# Altium PCB RGBParkLight.PCBDOC
Units mm, origin at the board's own origin, x right, y up, seen from the top; angles counter-clockwise.
Board outline 152.4 x 101.6 mm, 2 copper layers (Top Layer, Bottom Layer); 18 components, 25 nets, 61 pads, 14 vias.
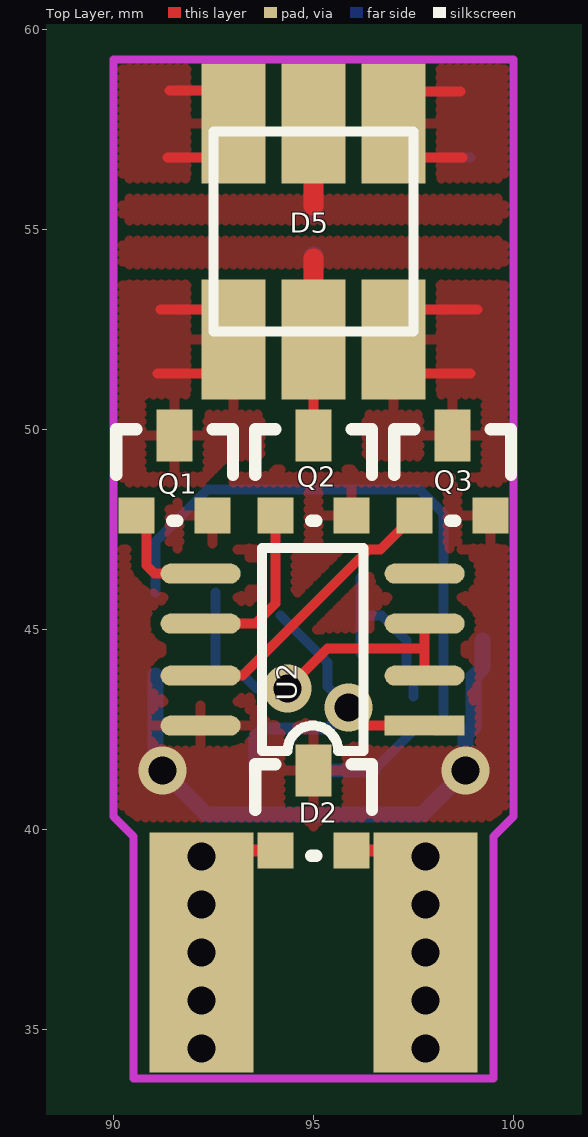
[diagram p0: Top Layer view]
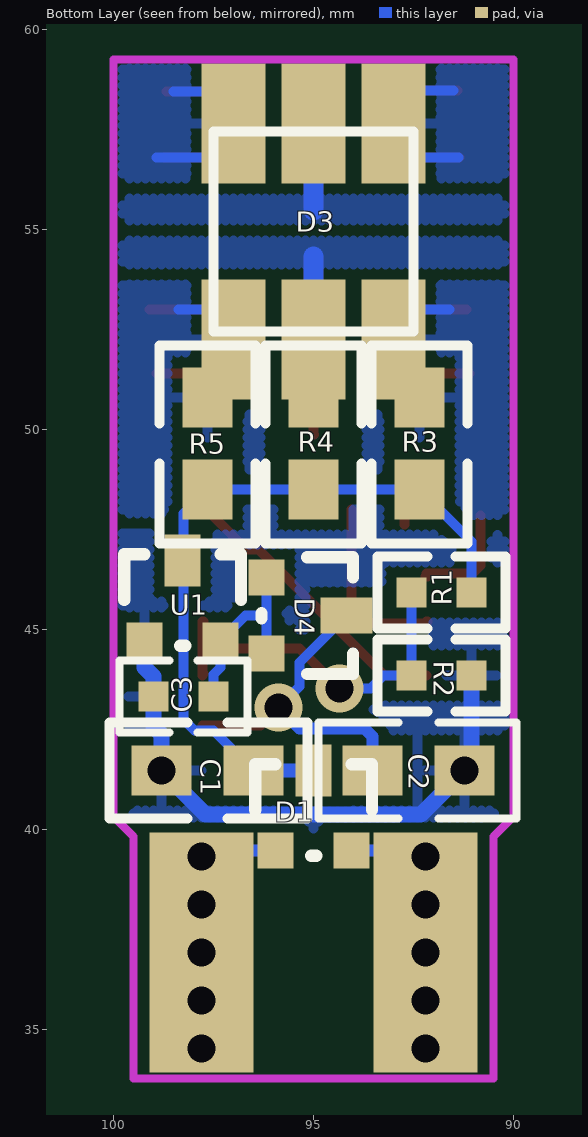
[diagram p1: Bottom Layer view, seen from below]

## Layer stack, top to bottom
Top Layer: signal copper 0.0356
Dielectric: dielectric 0.32, FR-4, Dk 4.8
Bottom Layer: signal copper 0.0356

## Board outline
25.4,25.4 177.8,25.4 177.8,127 25.4,127

## Design rules (kind name [scope] priority, off if disabled: settings)
Clearance [All] p1 off: gap=0.25
ComponentClearance [All] p1 off: gap=0 collisioncheckmode=0
PolygonConnect [All] p1: connectstyle=Relief reliefconductorwidth=0.254 reliefentries=4 polygonreliefangle="90 Angle"
RoutingLayers [All] p1: top layer=Horizontal bottom layer=Vertical
RoutingVias [All] p1: holewidth=0.711 width=1.27 viastyle="Through Hole" minholewidth=0.711 minwidth=1.27 maxholewidth=0.711 maxwidth=1.27
SolderMaskExpansion [All] p1: expansion=0.102
TestPointUsage [All] p1: valid=0 allowmultiple=FALSE
Testpoint [All] p1: side=15 testpointundercomponent=TRUE minsize=1.016 maxsize=2.54 preferedsize=1.524 minholesize=0 maxholesize=1.016 preferedholesize=0.813 testpointgrid=0.025 style=1023 order=1234567890
Width [All] p1: maxlimit=3 minlimit=0.2 preferedwidth=0.25 bottomlayer_prefwidth=0.4 minimp=50.000000 maximp=50.000000 favimp=50.000000
16 further rules are at their usual default settings.

## Components (designator, comment, footprint, x,y, rotation, side; value= is the part's Value field where it differs from the comment)
C1 "1uF/25V" 0805 96.5,41.475 r0 bottom
C2 "10uF/6.3V" 0805 93.525,41.475 r180 bottom
C3 "1uF/16V" 0603 97.5,43.325 r0 bottom
D1 "BAV70" SOT-23 95.95,39.475 r180 bottom
D2 "BAW56" SOT-23 94.05,39.475 r0 top
D3 "LED RGB" AF-5060 97,52.25 r180 bottom
D4 "BAT54C" SOT-23 96.175,46.3 r270 bottom (schematic designator D?)
D5 "LED RGB" AF-5060 97,57.65 r180 top
Q1 "DTC114YKA" SOT-23 90.575,47.85 r0 top
Q2 "DTC114YKA" SOT-23 94.05,47.85 r0 top
Q3 "DTC114YKA" SOT-23 97.525,47.85 r0 top
R1 "4k7 1%" 0603 91.05,45.925 r0 bottom
R2 "1k 1%" 0603 92.55,43.85 r180 bottom
R3 "220" 0805 92.35,48.5 r90 bottom
R4 "62" 0805 95,48.5 r90 bottom
R5 "62" 0805 97.65,48.5 r90 bottom
U1 "MCP1703" SOT-23 99.225,44.725 r180 bottom
U2 "PIC12F617" SO-8 97.775,42.6 r180 top

## Footprints (in the part's own frame and the unit in brackets; to place one, negate y for a bottom-side part, rotate by r counter-clockwise, add the part's x,y. Pads: shape width x height; smd on the part's side, far side on the other; paste and mask are expansions set on the pad)
0603 [mm]
  rect 0.75x0.75 smd: 1(0,0) 2(1.5,0)
  silkscreen extent -0.85,-0.9 2.35,0.9
0805 [mm]
  rect 1.5x1.25 smd: 1(0,0) 2(2.3,0)
  silkscreen extent -1.35,-1.2 3.6,1.2
AF-5060 [mm] "5060 SMD Package for 20 mA RGB LED with 6 pins"
  rect 1.6x3 smd: 1(0,0) 2(2,0) 3(4,0) 4(4,5.4) 5(2,5.4) 6(0,5.4)
  silkscreen extent -0.5,0.2 4.5,5.2
SO-8 [mm]
  rect 2x0.5 smd: 1(0,0)
  oval 2x0.5 smd: 2(0,-1.25) 3(0,-2.55) 4(0,-3.8) 5(5.6,-3.8) 6(5.6,-2.55) 7(5.6,-1.25) 8(5.6,0)
  silkscreen extent 1.52,-4.44 4.06,0.64
SOT-23 [mm]
  rect 0.9x0.9 smd: 1(0,0) 3(1.9,0)
  rect 0.9x1.3 smd: 2(0.95,2)
  silkscreen extent -0.51,-0.13 2.41,2.16

## Part data
C1 C2 C3: library part CAP, "Capacitor"
D1 D4: library part "DUAL DIODE BAV70"
D2: library part "DUAL DIODE BAW56"
D3 D5: library part LED
Q1 Q2 Q3: library part NPN1, "NPN Transistor"
R1 R2 R3 R4 R5: library part RES1
U1: library part VOLTREG
U2: library part PIC12F683

## Free pads (board coordinates)
  rect 2.6x6 smd: 0(92.2,36.925) 0(97.8,36.925)
  rect 2.6x6 smd far side: 0(92.2,36.925) 0(97.8,36.925)

## Via types
v1: diameter 1.2, hole 0.7, Top Layer to Bottom Layer, 14 vias

## Nets (pads, with @x,y where several pads share a name; then routed paths per layer and width w, separated by ;. In a path a pad name is that pad's centre, name@x,y a point inside that pad or via, vN(x,y) a via of type N, cw(c..) or ccw(c..) an arc to the next point about the centre after c; other vN are vias at no path point)
BLUE: Q3.1 U2.7 | length 7
  Top Layer w0.25: U2.7 93.225,43.85 96.375,47 96.675,47 Q3.1
D4AA: D3.4 | length 2.5
  Bottom Layer w0.25: 91.375,56.8 D3.4@92.75,56.8 ; 91.5,58.475 D3.4@92.625,58.475
D4AK: D5.3 | length 3
  Top Layer w0.25: 91.35,56.8 D5.3@92.875,56.8 ; 91.4,58.475 D5.3@92.825,58.475
D4BA: D3.5 | length 2.2
  Bottom Layer w0.5: 95,55.475 D3.5
D4BK: D5.2 | length 1.4
  Top Layer w0.5: 95,55.6 D5.2@95,57
D4CA: D3.6 | length 2.8
  Bottom Layer w0.25: D3.6@97.15,56.8 98.925,56.8 ; D3.6@97.425,58.45 98.5,58.45
D4CK: D5.1 | length 3.2
  Top Layer w0.25: D5.1@97.05,56.8 98.725,56.8 ; D5.1@97.175,58.45 98.675,58.45
GND: C1.2 C2.2 C3.2 D2.2 Q1.3 Q2.3 Q3.3 R2.2 U1.1 U2.8 | length 14.6
  Top Layer w0.25: Q1.3@92.725,47.625 Q1.3@92.725,47.85
  Bottom Layer w0.4: R2.2 91.05,41.65 92.325,40.375 97.7,40.375 v1(98.8,41.475) 98.8,42.375 99,42.575 99,43.825 99.225,44.05 U1.1
  other v1: 91.225,41.475
GREEN: Q2.1 U2.6 | length 4.5
  Top Layer w0.25: U2.6@92.15,45.2 U2.6@92.175,45.2 ; U2.6 93.55,45.15 94.05,45.65 Q2.1@94.05,48
IN1: D1.1 D2.3 pad.0@97.8,36.925 | length 3.8
  Top Layer w0.25: pad.0@97.65,39.475 v1(97.8,39.325)
  Top Layer w0.3: D2.3 pad.0@97.65,39.475
  Bottom Layer w0.25: pad.0@97.65,39.475 v1(97.8,39.325)
  Bottom Layer w0.3: D1.1 pad.0@97.65,39.475
  other v1: 97.8,34.525 97.8,35.725 97.8,36.925 97.8,38.125
IN2: D1.3 D2.1 pad.0@92.2,36.925 | length 3.6
  Top Layer w0.25: v1(92.2,39.325) pad.0@92.35,39.475
  Top Layer w0.3: pad.0@92.35,39.475 D2.1
  Bottom Layer w0.3: pad.0@92.35,39.475 D1.3
  other v1: 92.2,34.525 92.2,35.725 92.2,36.925 92.2,38.125
NetC3_1: C3.1 D4.1 D4.3 U1.3 | length 4.8
  Bottom Layer w0.25: D4.3 D4.1 ; 96.175,45.35 96.7,45.35 U1.3 97.325,44.05 97.5,43.875 C3.1
NetD3_1: D3.1 R5.2 | length 1
  Bottom Layer w0.25: D3.1@97.325,53 98.375,53
NetD3_2: D3.2 R4.2 | length 2.1
  Bottom Layer w0.5: D3.2 95,54.325
NetD3_3: D3.3 R3.2 | length 1.6
  Bottom Layer w0.25: 91.6,53 D3.3@93.175,53
NetD5_2: 
NetD5_4: D5.4 Q1.2 | length 4
  Top Layer w0.25: 91.1,51.4 D5.4@93.175,51.4 ; 91.175,53 D5.4@93.125,53
NetD5_5: D5.5 Q2.2 | length 3.8
  Top Layer w0.25: Q2.2@94.99,49.882 95,49.892 D5.5
  Top Layer w0.5: D5.5@95,52.875 95,54.275
NetD5_6: D5.6 Q3.2 | length 4
  Top Layer w0.25: D5.6@97,51.4 98.925,51.4 ; D5.6@97.025,53 99.1,53
NetQ2_2: 
NetR1_2: R1.2 R2.1 U2.2 U2.3 | length 9.2
  Top Layer w0.25: v1(94.35,43.525) 95.35,44.525 97.775,44.525 ; U2.2@97.75,43.9 U2.2@97.775,43.9 ; U2.3@97.75,45.2 U2.3@97.775,45.2 ; U2.2 U2.3
  Bottom Layer w0.25: R1.2 R2.1 93.25,43.85 93.575,43.525 v1(94.35,43.525)
NetU2_4: U2.4
POWER: C1.1 D1.2 R1.1 R3.1 R4.1 R5.1 U1.2 | length 18.2
  Bottom Layer w0.25: R1.1 91.05,47.2 R3.1 R5.1 98.25,47.9 98.25,46.375 98.25,42.75 97.975,42.475 97.5,42.475 C1.1
  Bottom Layer w0.35: D1.2 C1.1
RED: Q1.1 U2.5 | length 2.7
  Top Layer w0.25: Q1.1@90.825,47.85 90.825,46.6 91.025,46.4 U2.5 ; U2.5@92.15,46.325 U2.5@92.2,46.325
VCC: C2.1 D4.2 U2.1 | length 8.6
  Top Layer w0.25: v1(95.875,43.05) 96.325,42.6 U2.1
  Bottom Layer w0.25: D4.2 95.35,44.175 95.35,43.575 v1(95.875,43.05) ; 95.325,42.5 95.35,42.525
  Bottom Layer w0.3: C2.1 93.525,42.325 93.725,42.525 95.35,42.525 v1(95.875,43.05)

## Polygon pours and split planes (outlines as drawn)
GND on Top Layer (hatched 90Degree grid 0.2 track 0.25, remove dead copper): 89.775,40.075 89.775,49.85 100.25,49.85 100.25,40.075
NetD5_5 on Top Layer (hatched 90Degree grid 0.2 track 0.25, remove dead copper): 90.05,54.125 90.05,54.725 100.025,54.725 100.025,54.125
D4CK on Top Layer (hatched 90Degree grid 0.2 track 0.25, remove dead copper): 96.325,56.275 96.325,59.5 99.975,59.5 99.975,56.275
D4BK on Top Layer (hatched 90Degree grid 0.2 track 0.25, remove dead copper): 90.05,55.85 90.05,55.225 99.975,55.225 99.975,55.775 90.05,55.775
D4AK on Top Layer (hatched 90Degree grid 0.2 track 0.25, remove dead copper): 90.025,59.5 90.025,56.275 93.675,56.275 93.675,59.5
NetD5_4 on Top Layer (hatched 90Degree grid 0.2 track 0.25, remove dead copper): 93.675,48.675 93.675,53.625 90.05,53.625 90.05,48.675
NetD5_6 on Top Layer (hatched 90Degree grid 0.2 track 0.25, remove dead copper): 99.975,48.675 99.975,53.625 96.325,53.625 96.325,48.675
GND on Bottom Layer (hatched 90Degree grid 0.2 track 0.25, remove dead copper): 89.775,40.025 89.775,48.475 100.225,48.475 100.225,40.025
NetD3_1 on Bottom Layer (hatched 90Degree grid 0.2 track 0.25, remove dead copper): 96.325,47.9 96.325,53.625 100.075,53.625 100.075,47.9
NetD3_3 on Bottom Layer (hatched 90Degree grid 0.2 track 0.25, remove dead copper): 90.225,47.871 90.225,53.625 93.675,53.625 93.675,47.871
NetD3_2 on Bottom Layer (hatched 90Degree grid 0.2 track 0.25, remove dead copper): 89.875,54.125 89.875,54.725 100.025,54.725 100.025,54.125
D4AA on Bottom Layer (hatched 90Degree grid 0.2 track 0.25, remove dead copper): 93.8,56.15 89.95,56.15 89.95,59.625 93.8,59.625
D4CA on Bottom Layer (hatched 90Degree grid 0.2 track 0.25, remove dead copper): 96.275,59.55 100.075,59.55 100.075,56.275 96.332,56.275 96.332,59.55
D4BA on Bottom Layer (hatched 90Degree grid 0.2 track 0.25, remove dead copper): 90.077,55.775 100.025,55.775 100.025,55.225 90.05,55.225 90.05,55.775

## Keep-outs
Keep-Out Layer:
  lines w0.2: 90,40.325 90.5,39.825 90.5,33.775 99.5,33.775 99.5,39.825 100,40.325 100,59.25 90,59.25 90,40.325